# Altium PCB FRDM-TFC.PcbDoc (part 2 of 2)
Units mil, origin at the board's own origin, x right, y up, seen from the top; angles counter-clockwise.
Board outline 3200 x 2100 mil, 2 copper layers (Top Layer, Bottom Layer), stack 15.3 mil thick; 77 components, 81 nets, 511 pads, 817 vias.
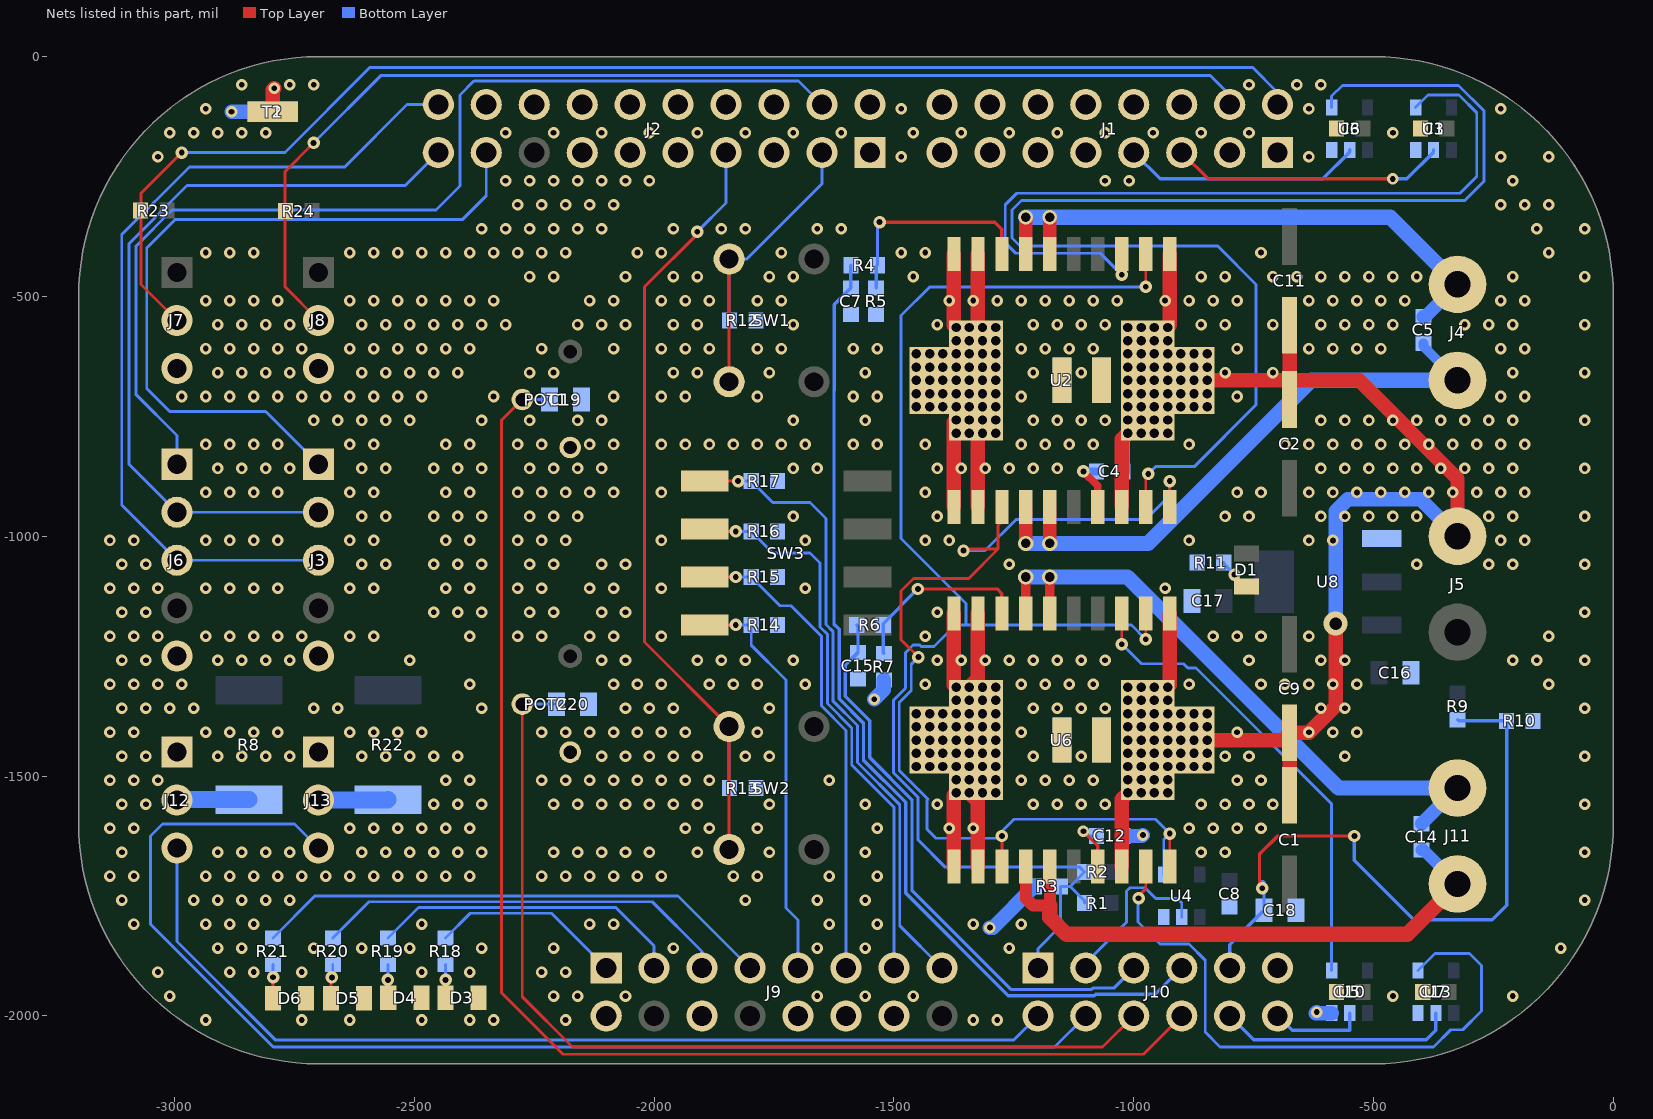
[diagram p2: the nets of this part, all layers, seen from the top]

## Via types
v1: diameter 24, hole 12, Top Layer to Bottom Layer, tented both sides, 770 vias
v2: diameter 26, hole 12, Top Layer to Bottom Layer, tented both sides, 36 vias
v3: diameter 32, hole 20, Top Layer to Bottom Layer, tented both sides, 4 vias
v4: diameter 24, hole 12, Top Layer to Bottom Layer, 2 vias
v5: diameter 30, hole 20, Top Layer to Bottom Layer, tented both sides, 2 vias
v6: diameter 26, hole 12, Top Layer to Bottom Layer, 1 vias
v7: diameter 50, hole 26, Top Layer to Bottom Layer, tented both sides, 1 vias
v8: diameter 44, hole 28, Top Layer to Bottom Layer, tented both sides, 1 vias

## Nets (pads, with @x,y where several pads share a name; then routed paths per layer and width w, separated by ;. In a path a pad name is that pad's centre, name@x,y a point inside that pad or via, vN(x,y) a via of type N, cw(c..) or ccw(c..) an arc to the next point about the centre after c; other vN are vias at no path point) (continued)
GND: C1.2 C2.2 C3.1 C4.2 C6.1 C7.2 C8.1 C9.2 C10.1 C11.2 C12.2 C13.1 C15.2 C16.2 C17.2 C18.1 C19.1 C20.1 D3.C D4.C D5.C D6.C J2.14 J3.5 J5.2 J6.5 J7.3 J8.3 J9.12 J9.14 J12.1 J13.1 POT1.3 POT2.3 R3.1 R5.1 R7.1 R10.2 R11.1 R12.1 R13.1 R14.1 R15.1 R16.1 R17.1 T1.1 T2.1 U1.3 U2.1 U2.9 U2.10 U2.11 U2.12 U2.18 U2.HEATSINK U3.3 U4.3 U5.3 U6.1 U6.9 U6.10 U6.11 U6.12 U6.18 U6.HEATSINK U7.3 U8.1 | length 4543.1
  Top Layer w30: T1.1@-2795,-115 -2795,-69 v1(-2792,-66) ; U6.11@-1375,-1688.78 -1375,-1539.76 U6.HEATSINK@-1370.47,-1535.24 ; U6.10@-1375,-1161.22 -1375,-1310.24 U6.HEATSINK@-1370.47,-1314.76 ; U2.11@-1375,-938.78 -1375,-762.2 U2.HEATSINK@-1370.47,-757.68 ; U2.10@-1375,-411.22 -1375,-560.24 U2.HEATSINK@-1370.47,-564.76 ; U6.HEATSINK@-1342.91,-1535.24 -1325,-1553.15 U6.12@-1325,-1688.78 ; U6.HEATSINK@-1342.91,-1314.76 -1325,-1296.85 U6.9@-1325,-1161.22 ; U2.HEATSINK@-1342.91,-730.12 -1325,-748.03 U2.12@-1325,-938.78 ; U2.9@-1325,-411.22 -1325,-555.12 U2.HEATSINK@-1315.35,-564.76 ; U6.18@-1025,-1688.78 -1025,-1548.03 U6.HEATSINK@-1012.2,-1535.24 ; U2.18@-1025,-938.78 -1025,-798.03 U2.HEATSINK@-1012.2,-785.24 ; U6.HEATSINK@-929.53,-1314.76 -925,-1310.24 U6.1@-925,-1161.22 ; U2.HEATSINK@-929.53,-564.76 -925,-560.24 U2.1@-925,-411.22 ; U6.HEATSINK@-901.97,-1425 U6.HEATSINK@-874.41,-1425 U6.HEATSINK@-846.85,-1425 -690,-1425 C9.2@-675,-1410 ; U2.HEATSINK@-874.41,-675 U2.HEATSINK@-846.85,-675 C2.2@-675,-675 ; C1.2@-675,-1540 C9.2@-675,-1410 ; C2.2@-675,-715 C2.2@-675,-675 ; C11.2@-675,-560 C2.2@-675,-675 ; v7(-579,-1182) -579,-1354 -635,-1410 C9.2@-675,-1410 ; J5.2@-325,-1000 -325,-880 -530,-675 C2.2@-675,-675
  Bottom Layer w30: v1(-2881,-115) T2.1@-2795,-115 ; v4(-1541,-1340) -1521,-1320 R7.1@-1521,-1299.56 ; v1(-1300,-1816) -1293.56,-1816 R3.1@-1207.56,-1730 ; C12.2@-1022.44,-1625 -983,-1625 v4(-981,-1623) ; C4.2@-1022.44,-865 -1022.44,-795.47 U2.HEATSINK@-1012.2,-785.24 ; v1(-618.42,-1992) -620.71,-1994.29 U5.3@-587.4,-1994.29 ; v7(-579,-1182) -579,-948 -554,-923 -402,-923 J5.2@-325,-1000
  other v1: -2934.74,-2008.65 -2734.74,-2008.65 -2634.74,-2008.65 -2484.74,-2008.65 -2384.74,-2008.65 -2334.74,-2008.65 -2184.74,-2008.65 -1334.74,-2008.65 -1284.74,-2008.65 -3009.74,-1958.65 -2209.74,-1958.65 -2159.74,-1958.65 -2059.74,-1958.65 -1659.74,-1958.65 -1559.74,-1958.65 -1459.74,-1958.65 -459.74,-1958.65 -209.74,-1958.65 -3034.74,-1908.65 -2884.74,-1908.65 -2834.74,-1908.65 -2734.74,-1908.65 -2484.74,-1908.65 -2384.74,-1908.65 -2234.74,-1908.65 -2184.74,-1908.65 -2909.74,-1858.65 -2859.74,-1858.65 -2709.74,-1858.65 -2609.74,-1858.65 -2509.74,-1858.65 -2359.74,-1858.65 -2209.74,-1858.65 -1959.74,-1858.65 -1659.74,-1858.65 -1559.74,-1858.65 -1259.74,-1858.65 -109.74,-1858.65 -3084.74,-1808.65 -2934.74,-1808.65 -2884.74,-1808.65 -2834.74,-1808.65 -2484.74,-1808.65 -2134.74,-1808.65 -2084.74,-1808.65 -1634.74,-1808.65 -1534.74,-1808.65 -1334.74,-1808.65 -1234.74,-1808.65 -3109.74,-1758.65 -2959.74,-1758.65 -2909.74,-1758.65 -2859.74,-1758.65 -2809.74,-1758.65 -2759.74,-1758.65 -1809.74,-1758.65 -1659.74,-1758.65 -1559.74,-1758.65 -59.74,-1758.65 -3134.74,-1708.65 -3084.74,-1708.65 -2934.74,-1708.65 -2884.74,-1708.65 -2834.74,-1708.65 -2784.74,-1708.65 -2734.74,-1708.65 -2684.74,-1708.65 -2634.74,-1708.65 -2584.74,-1708.65 -2534.74,-1708.65 -2484.74,-1708.65 -2434.74,-1708.65 -2384.74,-1708.65 -2234.74,-1708.65 -2184.74,-1708.65 -2134.74,-1708.65 -2084.74,-1708.65 -2034.74,-1708.65 -1984.74,-1708.65 -1834.74,-1708.65 -1784.74,-1708.65 -1634.74,-1708.65 -1534.74,-1708.65 -3109.74,-1658.65 -2909.74,-1658.65 -2859.74,-1658.65 -2809.74,-1658.65 -2759.74,-1658.65 -2609.74,-1658.65 -2559.74,-1658.65 -2509.74,-1658.65 -2459.74,-1658.65 -2409.74,-1658.65 -2359.74,-1658.65 -2209.74,-1658.65 -2159.74,-1658.65 -2109.74,-1658.65 -2059.74,-1658.65 -2009.74,-1658.65 -1909.74,-1658.65 -1759.74,-1658.65 -1559.74,-1658.65 -859.74,-1658.65 -809.74,-1658.65 -59.74,-1658.65 -3134.74,-1608.65 -3084.74,-1608.65 -2634.74,-1608.65 -2584.74,-1608.65 -2534.74,-1608.65 -2484.74,-1608.65 -2434.74,-1608.65 -2384.74,-1608.65 -1934.74,-1608.65 -1884.74,-1608.65 -1784.74,-1608.65 -1534.74,-1608.65 -1384.74,-1608.65 -1334.74,-1608.65 -884.74,-1608.65 -834.74,-1608.65 -784.74,-1608.65 -734.74,-1608.65 -3109.74,-1558.65 -3059.74,-1558.65 -2459.74,-1558.65 -2409.74,-1558.65 -2359.74,-1558.65 -2209.74,-1558.65 -2159.74,-1558.65 -2109.74,-1558.65 -2059.74,-1558.65 -2009.74,-1558.65 -1959.74,-1558.65 -1909.74,-1558.65 -1759.74,-1558.65 -1559.74,-1558.65 -1409.74,-1558.65 -1209.74,-1558.65 -1159.74,-1558.65 -1109.74,-1558.65 -1059.74,-1558.65 -859.74,-1558.65 -809.74,-1558.65 -759.74,-1558.65 -709.74,-1558.65 -59.74,-1558.65 -3134.74,-1508.65 -3084.74,-1508.65 -3034.74,-1508.65 -2434.74,-1508.65 -2384.74,-1508.65 -2234.74,-1508.65 -2184.74,-1508.65 -2134.74,-1508.65 -2084.74,-1508.65 -2034.74,-1508.65 -1984.74,-1508.65 -1934.74,-1508.65 -1884.74,-1508.65 -1634.74,-1508.65 -1234.74,-1508.65 -1184.74,-1508.65 -1134.74,-1508.65 -1084.74,-1508.65 -784.74,-1508.65 -734.74,-1508.65 -3109.74,-1458.65 -3059.74,-1458.65 -2909.74,-1458.65 -2859.74,-1458.65 -2809.74,-1458.65 -2759.74,-1458.65 -2609.74,-1458.65 -2559.74,-1458.65 -2509.74,-1458.65 -2459.74,-1458.65 -2409.74,-1458.65 -2109.74,-1458.65 -2059.74,-1458.65 -2009.74,-1458.65 -1959.74,-1458.65 -1909.74,-1458.65 -1809.74,-1458.65 -1759.74,-1458.65 -1209.74,-1458.65 -1109.74,-1458.65 -809.74,-1458.65 -759.74,-1458.65 -559.74,-1458.65 -59.74,-1458.65 -3134.74,-1408.65 -3084.74,-1408.65 -2934.74,-1408.65 -2884.74,-1408.65 -2834.74,-1408.65 -2784.74,-1408.65 -2634.74,-1408.65 -2584.74,-1408.65 -2534.74,-1408.65 -2484.74,-1408.65 -2234.74,-1408.65 -2184.74,-1408.65 -2134.74,-1408.65 -2084.74,-1408.65 -2034.74,-1408.65 -1984.74,-1408.65 -1934.74,-1408.65 -1784.74,-1408.65 -1234.74,-1408.65 -784.74,-1408.65 -634.74,-1408.65 -584.74,-1408.65 -534.74,-1408.65 -3109.74,-1358.65 -3059.74,-1358.65 -3009.74,-1358.65 -2959.74,-1358.65 -2709.74,-1358.65 -2659.74,-1358.65 -2359.74,-1358.65 -2059.74,-1358.65 -2009.74,-1358.65 -1959.74,-1358.65 -1759.74,-1358.65 -1209.74,-1358.65 -1159.74,-1358.65 -1109.74,-1358.65 -1059.74,-1358.65 -609.74,-1358.65 -559.74,-1358.65 -59.74,-1358.65 -3134.74,-1308.65 -3084.74,-1308.65 -3034.74,-1308.65 -2984.74,-1308.65 -2384.74,-1308.65 -2084.74,-1308.65 -2034.74,-1308.65 -1984.74,-1308.65 -1884.74,-1308.65 -1834.74,-1308.65 -1784.74,-1308.65 -1684.74,-1308.65 -1434.74,-1308.65 -1234.74,-1308.65 -1184.74,-1308.65 -1134.74,-1308.65 -1084.74,-1308.65 -884.74,-1308.65 -734.74,-1308.65 -684.74,-1308.65 -634.74,-1308.65 -584.74,-1308.65 -534.74,-1308.65 -134.74,-1308.65 -3109.74,-1258.65 -3059.74,-1258.65 -2909.74,-1258.65 -2859.74,-1258.65 -2809.74,-1258.65 -2759.74,-1258.65 -2509.74,-1258.65 -2109.74,-1258.65 -2059.74,-1258.65 -1909.74,-1258.65 -1859.74,-1258.65 -1809.74,-1258.65 -1709.74,-1258.65 -1409.74,-1258.65 -1359.74,-1258.65 -1309.74,-1258.65 -1259.74,-1258.65 -1209.74,-1258.65 -1159.74,-1258.65 -1109.74,-1258.65 -1059.74,-1258.65 -759.74,-1258.65 -609.74,-1258.65 -559.74,-1258.65 -209.74,-1258.65 -159.74,-1258.65 -59.74,-1258.65 -3134.74,-1208.65 -3084.74,-1208.65 -3034.74,-1208.65 -2934.74,-1208.65 -2884.74,-1208.65 -2834.74,-1208.65 -2784.74,-1208.65 -2734.74,-1208.65 -2634.74,-1208.65 -2584.74,-1208.65 -2384.74,-1208.65 -2284.74,-1208.65 -2234.74,-1208.65 -2134.74,-1208.65 -2084.74,-1208.65 -1984.74,-1208.65 -1434.74,-1208.65 -834.74,-1208.65 -784.74,-1208.65 -734.74,-1208.65 -634.74,-1208.65 -134.74,-1208.65 -3109.74,-1158.65 -3059.74,-1158.65 -2459.74,-1158.65 -2409.74,-1158.65 -2359.74,-1158.65 -2259.74,-1158.65 -2209.74,-1158.65 -2109.74,-1158.65 -2059.74,-1158.65 -1409.74,-1158.65 -59.74,-1158.65 -3134.74,-1108.65 -3084.74,-1108.65 -3034.74,-1108.65 -2934.74,-1108.65 -2884.74,-1108.65 -2834.74,-1108.65 -2784.74,-1108.65 -2634.74,-1108.65 -2584.74,-1108.65 -2434.74,-1108.65 -2384.74,-1108.65 -2284.74,-1108.65 -2234.74,-1108.65 -2134.74,-1108.65 -2084.74,-1108.65 -1984.74,-1108.65 -1684.74,-1108.65 -934.74,-1108.65 -3109.74,-1058.65 -3059.74,-1058.65 -2609.74,-1058.65 -2559.74,-1058.65 -2459.74,-1058.65 -2409.74,-1058.65 -2359.74,-1058.65 -2259.74,-1058.65 -2209.74,-1058.65 -2109.74,-1058.65 -2059.74,-1058.65 -1259.74,-1058.65 -409.74,-1058.65 -259.74,-1058.65 -209.74,-1058.65 -59.74,-1058.65 -3134.74,-1008.65 -3084.74,-1008.65 -2934.74,-1008.65 -2884.74,-1008.65 -2834.74,-1008.65 -2784.74,-1008.65 -2634.74,-1008.65 -2584.74,-1008.65 -2434.74,-1008.65 -2384.74,-1008.65 -2284.74,-1008.65 -2234.74,-1008.65 -2184.74,-1008.65 -1984.74,-1008.65 -1684.74,-1008.65 -1434.74,-1008.65 -1384.74,-1008.65 -884.74,-1008.65 -634.74,-1008.65 -584.74,-1008.65 -234.74,-1008.65 -184.74,-1008.65 -2609.74,-958.65 -2559.74,-958.65 -2459.74,-958.65 -2409.74,-958.65 -2359.74,-958.65 -2259.74,-958.65 -2209.74,-958.65 -2159.74,-958.65 -1709.74,-958.65 -1409.74,-958.65 -809.74,-958.65 -759.74,-958.65 -609.74,-958.65 -559.74,-958.65 -509.74,-958.65 -459.74,-958.65 -409.74,-958.65 -259.74,-958.65 -209.74,-958.65 -59.74,-958.65 -2934.74,-908.65 -2884.74,-908.65 -2834.74,-908.65 -2784.74,-908.65 -2634.74,-908.65 -2584.74,-908.65 -2434.74,-908.65 -2384.74,-908.65 -2284.74,-908.65 -2234.74,-908.65 -2184.74,-908.65 -2134.74,-908.65 -2084.74,-908.65 -1984.74,-908.65 -1434.74,-908.65 -784.74,-908.65 -734.74,-908.65 -634.74,-908.65 -584.74,-908.65 -534.74,-908.65 -484.74,-908.65 -434.74,-908.65 -384.74,-908.65 -334.74,-908.65 -284.74,-908.65 -234.74,-908.65 -184.74,-908.65 -2909.74,-858.65 -2859.74,-858.65 -2809.74,-858.65 -2759.74,-858.65 -2609.74,-858.65 -2559.74,-858.65 -2459.74,-858.65 -2409.74,-858.65 -2359.74,-858.65 -2259.74,-858.65 -2209.74,-858.65 -2159.74,-858.65 -2109.74,-858.65 -1709.74,-858.65 -1659.74,-858.65 -1409.74,-858.65 -1359.74,-858.65 -1309.74,-858.65 -1259.74,-858.65 -1209.74,-858.65 -1159.74,-858.65 -609.74,-858.65 -559.74,-858.65 -509.74,-858.65 -459.74,-858.65 -409.74,-858.65 -359.74,-858.65 -309.74,-858.65 -259.74,-858.65 -209.74,-858.65 -59.74,-858.65 -2934.74,-808.65 -2884.74,-808.65 -2834.74,-808.65 -2784.74,-808.65 -2634.74,-808.65 -2584.74,-808.65 -2434.74,-808.65 -2384.74,-808.65 -2284.74,-808.65 -2234.74,-808.65 -2134.74,-808.65 -2084.74,-808.65 -1984.74,-808.65 -1934.74,-808.65 -1884.74,-808.65 -1834.74,-808.65 -1784.74,-808.65 -1734.74,-808.65 -1684.74,-808.65 -1584.74,-808.65 -1534.74,-808.65 -1434.74,-808.65 -1234.74,-808.65 -1184.74,-808.65 -1134.74,-808.65 -1084.74,-808.65 -884.74,-808.65 -684.74,-808.65 -634.74,-808.65 -584.74,-808.65 -534.74,-808.65 -484.74,-808.65 -434.74,-808.65 -384.74,-808.65 -334.74,-808.65 -284.74,-808.65 -234.74,-808.65 -184.74,-808.65 -2709.74,-758.65 -2659.74,-758.65 -2609.74,-758.65 -2559.74,-758.65 -2509.74,-758.65 -2359.74,-758.65 -2259.74,-758.65 -2159.74,-758.65 -2109.74,-758.65 -1709.74,-758.65 -1559.74,-758.65 -1209.74,-758.65 -1159.74,-758.65 -1109.74,-758.65 -1059.74,-758.65 -609.74,-758.65 -559.74,-758.65 -509.74,-758.65 -459.74,-758.65 -409.74,-758.65 -359.74,-758.65 -309.74,-758.65 -259.74,-758.65 -209.74,-758.65 -59.74,-758.65 -2984.74,-708.65 -2934.74,-708.65 -2884.74,-708.65 -2834.74,-708.65 -2784.74,-708.65 -2734.74,-708.65 -2684.74,-708.65 -2634.74,-708.65 -2584.74,-708.65 -2534.74,-708.65 -2484.74,-708.65 -2334.74,-708.65 -2084.74,-708.65 -1984.74,-708.65 -1934.74,-708.65 -1784.74,-708.65 -1584.74,-708.65 -1534.74,-708.65 -1234.74,-708.65 -784.74,-708.65 -234.74,-708.65 -184.74,-708.65 -2909.74,-658.65 -2859.74,-658.65 -2809.74,-658.65 -2759.74,-658.65 -2609.74,-658.65 -2559.74,-658.65 -2509.74,-658.65 -2459.74,-658.65 -2409.74,-658.65 -2259.74,-658.65 -2209.74,-658.65 -1959.74,-658.65 -1909.74,-658.65 -1759.74,-658.65 -1559.74,-658.65 -1209.74,-658.65 -1109.74,-658.65 -809.74,-658.65 -709.74,-658.65 -209.74,-658.65 -59.74,-658.65 -2934.74,-608.65 -2884.74,-608.65 -2834.74,-608.65 -2784.74,-608.65 -2734.74,-608.65 -2634.74,-608.65 -2584.74,-608.65 -2534.74,-608.65 -2484.74,-608.65 -2434.74,-608.65 -2384.74,-608.65 -2234.74,-608.65 -2084.74,-608.65 -1984.74,-608.65 -1934.74,-608.65 -1884.74,-608.65 -1784.74,-608.65 -1734.74,-608.65 -1584.74,-608.65 -1534.74,-608.65 -1234.74,-608.65 -1184.74,-608.65 -1134.74,-608.65 -1084.74,-608.65 -784.74,-608.65 -634.74,-608.65 -584.74,-608.65 -534.74,-608.65 -484.74,-608.65 -234.74,-608.65 -184.74,-608.65 -2909.74,-558.65 -2859.74,-558.65 -2809.74,-558.65 -2759.74,-558.65 -2609.74,-558.65 -2559.74,-558.65 -2509.74,-558.65 -2459.74,-558.65 -2409.74,-558.65 -2359.74,-558.65 -2309.74,-558.65 -2159.74,-558.65 -2109.74,-558.65 -2059.74,-558.65 -1959.74,-558.65 -1909.74,-558.65 -1709.74,-558.65 -1409.74,-558.65 -1209.74,-558.65 -1159.74,-558.65 -1109.74,-558.65 -1059.74,-558.65 -859.74,-558.65 -809.74,-558.65 -709.74,-558.65 -609.74,-558.65 -559.74,-558.65 -509.74,-558.65 -459.74,-558.65 -309.74,-558.65 -259.74,-558.65 -209.74,-558.65 -59.74,-558.65 -2934.74,-508.65 -2884.74,-508.65 -2834.74,-508.65 -2784.74,-508.65 -2634.74,-508.65 -2584.74,-508.65 -2534.74,-508.65 -2484.74,-508.65 -2434.74,-508.65 -2384.74,-508.65 -2334.74,-508.65 -2134.74,-508.65 -2084.74,-508.65 -1984.74,-508.65 -1934.74,-508.65 -1884.74,-508.65 -1784.74,-508.65 -1734.74,-508.65 -1384.74,-508.65 -1334.74,-508.65 -1284.74,-508.65 -1234.74,-508.65 -1184.74,-508.65 -1134.74,-508.65 -1084.74,-508.65 -1034.74,-508.65 -934.74,-508.65 -884.74,-508.65 -834.74,-508.65 -784.74,-508.65 -634.74,-508.65 -584.74,-508.65 -534.74,-508.65 -484.74,-508.65 -434.74,-508.65 -234.74,-508.65 -184.74,-508.65 -2259.74,-458.65 -2209.74,-458.65 -2059.74,-458.65 -1959.74,-458.65 -1909.74,-458.65 -1759.74,-458.65 -1709.74,-458.65 -1459.74,-458.65 -859.74,-458.65 -809.74,-458.65 -709.74,-458.65 -659.74,-458.65 -609.74,-458.65 -559.74,-458.65 -509.74,-458.65 -459.74,-458.65 -409.74,-458.65 -209.74,-458.65 -59.74,-458.65 -2934.74,-408.65 -2884.74,-408.65 -2834.74,-408.65 -2634.74,-408.65 -2584.74,-408.65 -2534.74,-408.65 -2484.74,-408.65 -2434.74,-408.65 -2384.74,-408.65 -2334.74,-408.65 -2284.74,-408.65 -2234.74,-408.65 -2184.74,-408.65 -2034.74,-408.65 -1984.74,-408.65 -1734.74,-408.65 -1484.74,-408.65 -1434.74,-408.65 -734.74,-408.65 -134.74,-408.65 -2359.74,-358.65 -2309.74,-358.65 -2259.74,-358.65 -2209.74,-358.65 -2159.74,-358.65 -2109.74,-358.65 -1959.74,-358.65 -1859.74,-358.65 -1809.74,-358.65 -1659.74,-358.65 -1609.74,-358.65 -159.74,-358.65 -59.74,-358.65 -2284.74,-308.65 -2234.74,-308.65 -2184.74,-308.65 -2134.74,-308.65 -2084.74,-308.65 -234.74,-308.65 -184.74,-308.65 -134.74,-308.65 -2309.74,-258.65 -2259.74,-258.65 -2209.74,-258.65 -2159.74,-258.65 -2109.74,-258.65 -2059.74,-258.65 -2009.74,-258.65 -1059.74,-258.65 -1009.74,-258.65 -209.74,-258.65 -3034.74,-208.65 -1484.74,-208.65 -634.74,-208.65 -234.74,-208.65 -134.74,-208.65 -3009.74,-158.65 -2959.74,-158.65 -2909.74,-158.65 -2859.74,-158.65 -2809.74,-158.65 -2309.74,-158.65 -2209.74,-158.65 -2109.74,-158.65 -2009.74,-158.65 -1909.74,-158.65 -1809.74,-158.65 -1709.74,-158.65 -1609.74,-158.65 -1459.74,-158.65 -1359.74,-158.65 -1259.74,-158.65 -1159.74,-158.65 -1059.74,-158.65 -959.74,-158.65 -859.74,-158.65 -759.74,-158.65 -459.74,-158.65 -2934.74,-108.65 -1484.74,-108.65 -634.74,-108.65 -234.74,-108.65 -2859.74,-58.65 -2759.74,-58.65 -2709.74,-58.65 -759.74,-58.65 -659.74,-58.65 -609.74,-58.65
H-BRIDGE_A-IFB: C7.1 J10.7 R4.2 | length 2073.7
  Bottom Layer w7: R4.2@-1589.56,-435 -1590,-435.44 C7.1@-1590,-482.44 -1624.42,-516.86 -1624.42,-695.35 -1625,-695.93 -1625,-1183.38 -1614.23,-1194.15 -1614.23,-1338.92 -1563.5,-1389.66 -1563.5,-1466.75 -1475.5,-1554.75 -1475.5,-1743.88 -1261.38,-1958 -1082.6,-1958 -1079.6,-1955 -955,-1955 J10.7@-900,-1900
H-BRIDGE_A-IN1: J1.5 U1.2 | length 575.6
  Top Layer w7: J1.5@-900,-200 -845,-255 v1(-460,-255)
  Bottom Layer w7: v1(-460,-255) -431.13,-255 -375,-198.87 U1.2@-375,-194.29
H-BRIDGE_A-IN2: J1.7 U3.2 | length 500.6
  Bottom Layer w7: J1.7@-1000,-200 -945,-255 -606.13,-255 -550,-198.87 U3.2@-550,-194.29
H-BRIDGE_A-OUT1: C5.2 J4.2 U2.6 U2.7 | length 1209.4
  Top Layer w28: U2.7@-1225,-411.22 v5(-1225,-335) ; U2.6@-1175,-411.22 v5(-1175,-335)
  Bottom Layer w28: C5.2@-396,-542.44 -392.44,-542.44 J4.2@-325,-475
  Bottom Layer w32: v5(-1225,-335) v5(-1175,-335) -465,-335 J4.2@-325,-475
H-BRIDGE_A-OUT2: C5.1 J4.1 U2.14 U2.15 | length 1300.1
  Top Layer w28: v3(-1225,-1015) U2.14@-1225,-938.78 ; v3(-1175,-1015) U2.15@-1175,-938.78
  Bottom Layer w20: C5.1@-396,-597.56 -396,-604 J4.1@-325,-675
  Bottom Layer w32: v3(-1225,-1015) v3(-1175,-1015) -970,-1015 -630,-675 J4.1@-325,-675
H-BRIDGE_B-IFB: C15.1 J10.5 R6.2 | length 1189.6
  Bottom Layer w7: R6.2@-1577.56,-1185 -1575,-1187.56 C15.1@-1575,-1242.44 -1601.23,-1268.67 -1601.23,-1333.54 -1550.5,-1384.27 -1550.5,-1461.37 -1462.5,-1549.37 -1462.5,-1738.5 -1256,-1945 -1087.99,-1945 -1084.99,-1942 -1042,-1942 J10.5@-1000,-1900
H-BRIDGE_B-IN1: J10.12 U5.2 | length 198.1
  Bottom Layer w7: J10.12@-700,-2000 -670,-2030 -550,-2030 U5.2@-550,-1994.29
H-BRIDGE_B-IN2: J10.10 U7.2 | length 494.7
  Bottom Layer w7: J10.10@-800,-2000 -750,-2050 -390,-2050 -370,-2030 U7.2@-370,-1994.29
H-BRIDGE_B-OUT1: C14.2 J11.2 U6.6 U6.7 | length 1340.5
  Top Layer w20: U6.7@-1225,-1161.22 v3(-1225,-1085) ; U6.6@-1175,-1161.22 v3(-1175,-1085)
  Bottom Layer w28: C14.2@-400,-1599.44 -325.56,-1525 J11.2@-325,-1525
  Bottom Layer w32: v3(-1225,-1085) v3(-1175,-1085) -1013,-1085 -573,-1525 J11.2@-325,-1525
H-BRIDGE_B-OUT2: C14.1 J11.1 U6.14 U6.15 | length 1240.8
  Top Layer w25: U6.14@-1225,-1688.78 -1225,-1755 -1210,-1770 -1175,-1770 U6.15@-1175,-1688.78
  Top Layer w32: -1175,-1770 -1175,-1795 -1140,-1830 -430,-1830 J11.1@-325,-1725
  Bottom Layer w25: C14.1@-400,-1654.56 -395.44,-1654.56 J11.1@-325,-1725
NetC4_1: C4.1 U2.17 | length 113.6
  Top Layer w16: v2(-1105,-865) -1075,-895 U2.17@-1075,-938.78
  Bottom Layer w16: v2(-1105,-865) C4.1@-1077.56,-865
NetC12_1: C12.1 U6.17 | length 117.8
  Top Layer w7: v1(-1105,-1615) -1075,-1645 U6.17@-1075,-1688.78
  Bottom Layer w7: v1(-1105,-1615) -1095,-1625 C12.1@-1077.56,-1625
NetD1_C: D1.C R11.2 | length 69.4
  Top Layer w7: v2(-790,-1080) -789.45,-1080 D1.C@-765,-1104.45
  Bottom Layer w7: R11.2@-812.44,-1055 -812.44,-1057.56 v2(-790,-1080)
NetD3_A: D3.A R18.2 | length 69.6
  Top Layer w6: D3.A@-2435.45,-1962 -2435.45,-1925.45 v2(-2435,-1925)
  Bottom Layer w6: v2(-2435,-1925) R18.2@-2435,-1892.56
NetD4_A: D4.A R19.2 | length 69.7
  Top Layer w6: v2(-2555,-1925) -2554.45,-1925.55 D4.A@-2554.45,-1962
  Bottom Layer w6: v2(-2555,-1925) R19.2@-2555,-1892.56
NetD5_A: D5.A R20.2 | length 75
  Top Layer w6: D5.A@-2673.45,-1963 -2673.45,-1918.45 v2(-2671.9,-1920)
  Bottom Layer w6: v2(-2671.9,-1920) -2670,-1918.1 R20.2@-2670,-1892.56
NetD6_A: D6.A R21.2 | length 70.7
  Top Layer w6: D6.A@-2794.45,-1963 v2(-2794.45,-1919.45)
  Bottom Layer w6: R21.2@-2795,-1892.56 -2794.45,-1893.11 v2(-2794.45,-1919.45)
NetJ12_2: J12.2 R8.2 | length 150.3
  Bottom Layer w35: J12.2@-2995,-1550 -2994.17,-1549.17 R8.2@-2845,-1549.17
NetJ13_2: J13.2 R22.2 | length 145.3
  Bottom Layer w35: J13.2@-2700,-1550 -2555.83,-1550 R22.2@-2555,-1549.17
NetR4_1: R4.1 R5.2 U2.8 | length 452.8
  Top Layer w7: v2(-1530,-345) -1290,-345 -1275,-360 U2.8@-1275,-411.22
  Bottom Layer w7: R5.2@-1537,-482.44 -1537,-437.56 R4.1@-1534.44,-435 -1534.44,-349.44 v2(-1530,-345)
NetR6_1: R6.1 R7.2 U6.8 | length 385.4
  Top Layer w7: v2(-1450,-1110) -1285,-1110 -1275,-1120 U6.8@-1275,-1161.22
  Bottom Layer w7: R7.2@-1521,-1244.44 -1522.44,-1243 R6.1@-1522.44,-1185 -1522.44,-1182.44 v2(-1450,-1110)
NetU1_4: U1.4 U2.3 | length 1687.3
  Top Layer w6: v2(-1025,-455) U2.3@-1025,-411.22
  Bottom Layer w6: v2(-1025,-455) -1070,-410 -1246,-410 -1268,-388 -1268,-309 -1244,-285 -320,-285 -285,-250 -285,-117.04 -322.06,-79.98 -386.67,-79.98 U1.4@-412.4,-105.71
NetU2_13: U2.13 U2.20 U4.4 U6.13 U6.20 | length 2290.2
  Top Layer w6: v6(-1449,-1252) -1485,-1216 -1485,-1113.89 -1459.11,-1088 -1344,-1088 -1282.94,-1026.94 ; v2(-1355,-1030) -1351.94,-1026.94 -1282.94,-1026.94 ; U6.13@-1275,-1688.78 v2(-1275,-1625) ; U2.13@-1275,-938.78 -1275,-970 -1282.94,-977.94 -1282.94,-1026.94 ; U6.20@-925,-1688.78 v2(-925,-1620) ; U2.20@-925,-938.78 v2(-925,-885)
  Bottom Layer w6: v6(-1449,-1252) -1464,-1267 -1464,-1321.78 -1489,-1346.78 -1489,-1488.22 -1429,-1548.22 -1430.74,-1549.96 -1430.74,-1611.26 -1412.35,-1629.65 -1279.65,-1629.65 v2(-1275,-1625) -1275,-1615 -1250,-1590 -955,-1590 v2(-925,-1620) -937.4,-1632.4 U4.4@-937.4,-1705.71 ; v2(-1355,-1030) -1310,-1030 -1245,-965 -975,-965 -925,-915 v2(-925,-885)
NetU2_19: U2.19 U3.4 | length 2741.5
  Top Layer w6: U2.19@-975,-938.78 -975,-875 v2(-970,-870)
  Bottom Layer w6: v2(-970,-870) -955,-855 -874,-855 -745,-726 -745,-475 -825,-395 -1237,-395 -1254,-378 -1254,-320 -1234,-300 -310,-300 -270,-260 -270,-113 -323,-60 -565,-60 -587.4,-82.4 U3.4@-587.4,-105.71
NetU5_4: U5.4 U6.3 | length 987.3
  Top Layer w6: v2(-1025,-1225) U6.3@-1025,-1161.22
  Bottom Layer w6: v2(-1025,-1225) -984,-1266 -896.27,-1266 -887.27,-1275 -870,-1275 -587.4,-1557.6 U5.4@-587.4,-1905.71
NetU6_19: U6.19 U7.4 | length 1326
  Top Layer w6: v2(-990,-1755) -990,-1750 -975,-1735 U6.19@-975,-1688.78
  Bottom Layer w6: v2@-991,-1751 -991,-1804 -945,-1850 -885,-1850 -851,-1884 -851,-2034 -820,-2065 -375,-2065 -339,-2029 -314,-2029 -275,-1990 -275,-1895 -300,-1870 -371.69,-1870 U7.4@-407.4,-1905.71 ; v2(-990,-1755) v2@-990,-1750
P5V_USB: J9.10
PTA1: J1.2 J7.2 R23.1 | length 2821.1
  Top Layer w6: J7.2@-2995,-550 -3070,-475 -3070,-285 v2(-2985,-200)
  Bottom Layer w6: v2(-2985,-200) -2770,-200 -2593,-23 -752,-23 -700,-75 J1.2@-700,-100
PTA2: J1.4 J8.2 R24.1 | length 2429.2
  Top Layer w6: v2(-2710,-180) -2770,-240 -2770,-480 J8.2@-2700,-550
  Bottom Layer w6: v2(-2710,-180) -2569,-39 -841,-39 -800,-80 J1.4@-800,-100
PTA4: J1.10
PTA5: J1.12
PTA12: J1.8
PTA13: J2.2
PTA16: J2.9
PTA17: J2.11
PTB0: J10.2 J12.3 | length 2095.6
  Bottom Layer w6: J12.3@-2995,-1650 -2995,-1845 -2790,-2050 -1250,-2050 J10.2@-1200,-2000
PTB1: J10.4 J13.3 | length 2648
  Bottom Layer w6: J13.3@-2700,-1650 -2750,-1600 -3025,-1600 -3050,-1625 -3050,-1809 -2794,-2065 -1165,-2065 J10.4@-1100,-2000
PTB2: C20.2 J10.6 POT2.2 | length 2027
  Top Layer w6: POT2.2@-2275,-1350 -2275,-1960 -2170,-2065 -1065,-2065 J10.6@-1000,-2000
  Bottom Layer w6: POT2.2@-2275,-1350 C20.2@-2203.46,-1350
PTB3: C19.2 J10.8 POT1.2 | length 2815.5
  Top Layer w6: POT1.2@-2275,-715 -2318,-758 -2318,-1952 -2190,-2080 -980,-2080 J10.8@-900,-2000
  Bottom Layer w6: POT1.2@-2275,-715 C19.2@-2218.46,-715
PTB8: J9.1 R18.1 | length 403.5
  Bottom Layer w6: R18.1@-2435,-1837.44 -2383.56,-1786 -2214,-1786 J9.1@-2100,-1900
PTB9: J9.3 R19.1 | length 660.4
  Bottom Layer w6: R19.1@-2555,-1837.44 -2491.56,-1774 -2080,-1774 -2000,-1854 J9.3@-2000,-1900
PTB10: J9.5 R20.1 | length 878.3
  Bottom Layer w6: R20.1@-2670,-1837.44 -2594.56,-1762 -2004,-1762 -1900,-1866 J9.5@-1900,-1900
PTB11: J9.7 R21.1 | length 1093.4
  Bottom Layer w6: R21.1@-2795,-1837.44 -2707.56,-1750 -1950,-1750 J9.7@-1800,-1900
PTC0: J1.3
PTC5: J1.9
PTC6: J1.11
PTC7: J1.1
PTC8: J1.14
PTC9: J1.16
PTC10: J1.13
PTC11: J1.15
PTC12: J2.1
PTC13: J2.3 R12.2 SW1.B | length 691.1
  Top Layer w6: SW1.B@-1843.58,-677.95 SW1.B@-1843.58,-422.05
  Bottom Layer w6: R12.2@-1843.58,-533.58 SW1.B@-1843.58,-422.05 -1807.05,-422.05 -1650,-265 J2.3@-1650,-200
PTC16: J2.5
PTC17: J2.7 R13.2 SW2.B | length 1731.9
  Top Layer w6: v2(-1910,-365) -1905,-365 -2020,-480 -2020,-1220.63 SW2.B@-1843.58,-1397.05 SW2.B@-1843.58,-1652.95
  Bottom Layer w6: v2(-1910,-365) -1850,-305 J2.7@-1850,-200 ; SW2.B@-1843.58,-1397.05 -1843.58,-1523.98 R13.2@-1842.56,-1525
PTD0: J2.6
PTD1: J2.12
PTD2: J2.8
PTD3: J2.10
PTD4: J1.6
PTD5: J2.4 J6.1 | length 2194.3
  Bottom Layer w6: J6.1@-2995,-850 -2995,-790 -3080,-705 -3080,-395 -3005,-320 -2455,-320 -2405,-270 -2405,-80 -2376,-51 -1699,-51 J2.4@-1650,-100
PTD6: J2.17 J3.1 | length 1559.6
  Bottom Layer w6: J3.1@-2700,-850 -2810,-740 -3010,-740 -3058,-692 -3058,-399 -2999,-340 -2400,-340 -2350,-290 J2.17@-2350,-200
PTD7: J2.19 J3.2 J6.2 | length 1620.1
  Bottom Layer w6: J3.2@-2700,-950 J6.2@-2995,-950 -3095,-850 -3095,-390 -2974,-269 -2519,-269 J2.19@-2450,-200
PTE0: J2.18
PTE1: J2.20 J3.3 J6.3 | length 1793.9
  Bottom Layer w6: J3.3@-2700,-1050 J6.3@-2995,-1050 -3110,-935 -3110,-371 -2969,-230 -2645,-230 -2515,-100 J2.20@-2450,-100
PTE2: J9.9 R14.2 SW3.2 | length 852.4
  Top Layer w6: SW3.2@-1894.5,-1185 v2(-1830,-1185)
  Bottom Layer w6: v2(-1830,-1185) R14.2@-1797.56,-1185 -1797.56,-1227.44 -1725,-1300 -1725,-1775 -1700,-1800 J9.9@-1700,-1900
PTE3: J9.11 R15.2 SW3.4 | length 1007
  Top Layer w6: SW3.4@-1894.5,-1085 v2(-1830,-1085)
  Bottom Layer w6: v2(-1830,-1085) R15.2@-1797.56,-1085 -1737.56,-1145 -1715,-1145 -1650.73,-1209.27 -1650.73,-1354.04 -1600,-1404.77 J9.11@-1600,-1900
PTE4: J9.13 R16.2 SW3.6 | length 1177.7
  Top Layer w6: SW3.6@-1894.5,-985 -1889.5,-990 v2(-1830,-990)
  Bottom Layer w6: v2(-1830,-990) R16.2@-1797.56,-990 -1752.56,-1035 -1675,-1035 -1654,-1056 -1654,-1189.03 -1638.73,-1204.3 -1638.73,-1349.07 -1588,-1399.8 -1588,-1476.9 -1500,-1564.9 J9.13@-1500,-1900
PTE5: J9.15 R17.2 SW3.8 | length 1322
  Top Layer w6: SW3.8@-1894.5,-885 v2(-1825,-885)
  Bottom Layer w6: v2(-1825,-885) R17.2@-1797.56,-885 -1752.56,-930 -1675,-930 -1642,-963 -1642,-1184.06 -1626.73,-1199.33 -1626.73,-1344.1 -1576,-1394.83 -1576,-1471.93 -1488,-1559.93 -1488,-1812 J9.15@-1400,-1900
PTE20: J10.1 R1.1 R2.1 R3.2 U2.2 U6.2 | length 2994.1
  Top Layer w6: v2(-975,-1215) U6.2@-975,-1161.22 ; v2(-975,-480) U2.2@-975,-411.22
  Bottom Layer w6: J10.1@-1200,-1900 -1200,-1860 -1152.44,-1812.44 R3.2@-1152.44,-1730 -1132.56,-1730 ; R1.1@-1102.56,-1765 -1102.56,-1760 -1132.56,-1730 ; v2(-975,-1215) -1005,-1185 -1350,-1185 ; v2(-975,-480) -1425,-480 -1485,-540 -1485,-1005 -1350,-1140 -1350,-1185 ; -1350,-1185 -1372,-1185 -1416.65,-1229.65 -1443.43,-1229.65 -1446.09,-1227 -1460,-1227 -1476,-1243 -1476,-1316.81 -1501,-1341.81 -1501,-1493.19 -1450,-1544.19 -1450,-1633 -1393,-1690 -1112.56,-1690 R2.1@-1102.56,-1700 -1132.56,-1730
PTE21: J10.3 U4.2 | length 355.7
  Bottom Layer w6: J10.3@-1100,-1900 -1100,-1890 -1015,-1805 -1015,-1740 -1008,-1733 -976.84,-1733 -954.84,-1755 -910,-1755 -900,-1765 U4.2@-900,-1794.29
PTE29: C18.2 J10.9 R9.2 R10.1 | length 1442.4
  Top Layer w7: v2(-732,-1734) -738,-1728 -738,-1663 -700,-1625 v2(-540,-1625)
  Bottom Layer w7: J10.9@-800,-1900 -800,-1851.54 C18.2@-728.46,-1780 -728.46,-1721.54 -730,-1720 -738,-1720 -732,-1726 v2(-732,-1734) ; v2(-540,-1625) -540,-1676 -416,-1800 -253,-1800 -222.56,-1769.56 R10.1@-222.56,-1385 -322.56,-1385 R9.2@-325,-1382.56
PTE30: J10.11
PTE31: J2.13
RESET/PTA20: J9.6
SDA_PTD5: J9.2
VREFH: J2.16
pads on no net: J2.15 U1.1 U3.1 U4.1 U5.1 U7.1

## Polygon pours and split planes (outlines as drawn)
GND on Bottom Layer "Bottom Layer-No Net" (solid, remove dead copper, pour order 5): -3200,0 -3200,-2100 0,-2100 0,0 -3200,0
GND on Top Layer "Bottom Layer-No Net" (solid, remove dead copper, pour order 7): -3200,0 -3200,-2100 -100,-2100 0,-2100 0,0 -3200,0

## Keep-outs
Keep-Out Layer:
  the board outline again, w5

## Other copper
Top Layer:
  text "Top Copper" at -2050,100 h250
Bottom Layer:
  text "Bottom Copper" at -875,100 h250

## Silkscreen, mask and mechanical layers (free items; w line width, h text height)
Top Overlay:
  lines w10: -2820,-2010 -2340,-2010 -2340,-2000 -2820,-2000 ; -2810,-1925 -2330,-1925 ; -2810,-1915 -2330,-1915 ; -2700,-2030 -2700,-1900 ; -2580,-2025 -2580,-1900 ; -2575,-745 -2530,-745 -2530,-645 -2495,-645 -2495,-745 -2440,-745 -2440,-645 -2405,-645 -2405,-745 -2350,-745 ; -2460,-2025 -2460,-1900 ; -2150,-1950 -2150,-1855 -2050,-1855 -2050,-1950 -2150,-1950 ; -1600,-245 -1600,-150 -1500,-150 -1500,-245 -1600,-245 ; -1250,-1950 -1250,-1850 -1150,-1850 -1150,-1950 -1250,-1950 ; -750,-245 -650,-245 -650,-150 -750,-150 -750,-245
  lines w15: -2845.25,-209 -2745.25,-209 ; -2820.25,-234 -2770.25,-234 ; -2805.25,-259 -2785.25,-259 ; -2795.25,-209 -2795.25,-154
  lines w20: -2834,-1900 -2834,-2025 -2820,-2025 ; -2834,-1890 -2820,-1890 -2820,-1910 ; -2820,-1920 -2820,-2025 ; -2820,-1900 -2340,-1900 -2340,-2025 -2820,-2025 ; -2315,-2000 -2315,-1920 ; -2330,-2000 -2330,-1920 -2300,-1920 -2300,-2000 -2330,-2000
  text "J2" at -2475,-40 h50
  text "2" at -1565,-40 h50
  text "J1" at -1440,-40 h50
  text "2" at -710,-40 h50
  text "1" at -1555,-285 h50
  text "1" at -705,-290 h50
  text "V2013.03.22.emh - b" at -2490,-345 h100
  text "0" at -2944,-359 h200
  text "1" at -2645,-363 h200
  text "SPEED" at -2505,-405 h32
  text "SENSORS" at -2525,-435 h32
  text "A-1" at -40,-540 h100 r90
  text "S" at -2560,-615 h325
  text "A" at -1620,-745 h250
  text "A-2" at -30,-755 h100 r90
  text "LINESCAN" at -2315,-1020 h50
  text "CAMERAS" at -2310,-1065 h50
  text "GND" at -27,-1074 h100 r90
  text "c" at -2570,-1135 h500
  text "VBAT" at -27,-1344 h100 r90
  text "SERVOS" at -2560,-1465 h60
  text "B" at -1610,-1520 h250
  text "B-2" at -45,-1590 h100 r90
  text "s" at -2565,-1705 h350
  text "B-1" at -45,-1790 h100 r90
  text "FRDM-TFC" at -1730,-1820 h100
  text "F" at -2450,-1830 h250
  text "1" at -1280,-1915 h50
  text "1" at -2185,-1925 h50
  text "2" at -2185,-2015 h50
  text "2" at -1280,-2020 h50
  text "J9" at -2135,-2090 h50
  text "J10" at -1240,-2090 h50
Bottom Overlay:
  lines w10: 4221.5,-7060 4222,-7060
  lines w15: -2845,-210 -2745,-210 ; -2820,-235 -2770,-235 ; -2805,-260 -2785,-260 ; -2795,-210 -2795,-155
  text "3.3v" at -3050,-475 h75
  text "A-1" at -105,-515 h100
  text "SPEED" at -3035,-545 h55
  text "SENSE" at -3035,-590 h55
  text "GND" at -3040,-680 h75
  text "A-2" at -105,-705 h100
  text "AIN" at -3050,-875 h75
  text "SI" at -3055,-970 h75
  text "GND" at -65,-1030 h100
  text "CLK" at -3045,-1070 h75
  text "3.3v" at -3050,-1170 h75
  text "VBAT" at -30,-1230 h100
  text "GND" at -3045,-1275 h75
  text "GND" at -3040,-1475 h75
  text "B-1" at -95,-1555 h100
  text "+6v" at -3040,-1565 h75
  text "SERVO" at -3040,-1640 h50
  text "W" at -1925,-1670 h250
  text "PWM" at -3045,-1685 h62
  text "Wavenumber LLC" at -1930,-1715 h50
  text "DREAM>DESIGN>DELIVER" at -1930,-1750 h30
  text "B-2" at -95,-1760 h100
  text "ehughes@wavenumber.net" at -1935,-1785 h30
Outline:
  the board outline again, w10
Title Block Top:
  lines w0: 2515.09,-5508.16 122.09,-5508.16 122.09,-4918.34 2515.09,-4918.34
  lines w8: 820.05,-5508.16 820.05,-4918.34 ; 820.05,-5311.55 2515.09,-5311.55 ; 820.05,-5114.95 2515.09,-5114.95 ; 1368.44,-5311.55 1368.44,-5114.95 ; 2515.09,-5508.16 122.09,-5508.16 122.09,-4918.34 2515.09,-4918.34
  lines w10: -7384.74,-4608.65 -7284.74,-4608.65 ; -7384.74,-3608.65 -7284.74,-3608.65 -7284.74,-2608.65 -7384.74,-2608.65 ; -7384.74,-1608.65 -7284.74,-1608.65 ; -7384.74,-608.65 -7284.74,-608.65 ; -7384.74,391.35 -7284.74,391.35 ; -7384.74,1391.35 -7284.74,1391.35 ; -6384.74,-5608.65 -6384.74,-5508.65 ; -6384.74,1791.35 -6384.74,1891.35 ; -5384.74,-5608.65 -5384.74,-5508.65 ; -5384.74,1791.35 -5384.74,1891.35 ; -4384.74,-5608.65 -4384.74,-5508.65 ; -4384.74,1791.35 -4384.74,1891.35 ; -3384.74,-5608.65 -3384.74,-5508.65 ; -3384.74,1791.35 -3384.74,1891.35 ; -2384.74,-5608.65 -2384.74,-5508.65 ; -2384.74,1791.35 -2384.74,1891.35 ; -1384.74,-5608.65 -1384.74,-5508.65 ; -1384.74,1791.35 -1384.74,1891.35 ; -384.74,-5608.65 -384.74,-5508.65 ; -384.74,1791.35 -384.74,1891.35 ; 615.26,-5608.65 615.26,-5508.65 ; 615.26,1791.35 615.26,1891.35 ; 1615.26,-5608.65 1615.26,-5508.65 ; 1615.26,1791.35 1615.26,1891.35 ; 2515.09,-5508.16 2515.09,-4918.34 ; 2515.26,-4608.65 2615.26,-4608.65 ; 2515.26,-3608.65 2615.26,-3608.65 2615.26,-2608.65 2515.26,-2608.65 ; 2515.26,-1608.65 2615.26,-1608.65 ; 2515.26,-608.65 2615.26,-608.65 ; 2515.26,391.35 2615.26,391.35 ; 2515.26,1391.35 2615.26,1391.35 ; 2615.26,-5508.65 2615.26,-5608.65 ; 2615.26,-5608.65 -7384.74,-5608.65 -7384.74,1891.35 2615.26,1891.35 2615.26,-5608.65 ; -7284.74,-5508.65 2515.26,-5508.65 2515.26,1791.35 -7284.74,1791.35 -7284.74,-5508.65
  text "1" at -6919.74,1811.35 h100
  text "2" at -5844.74,1811.35 h100
  text "3" at -4894.74,1811.35 h100
  text "4" at -3844.74,1811.35 h100
  text "5" at -2894.74,1811.35 h100
  text "6" at -1869.74,1811.35 h100
  text "7" at -919.74,1811.35 h100
  text "8" at 55.26,1811.35 h100
  text "9" at 1155.26,1811.35 h100
  text "10" at 2105.26,1811.35 h100
  text "H" at -7369.74,1556.35 h100
  text "H" at 2535.26,1551.35 h100
  text "G" at -7369.74,831.35 h100
  text "G" at 2535.26,826.35 h100
  text "F" at -7359.74,-153.65 h100
  text "F" at 2545.26,-158.65 h100
  text "E" at -7369.74,-1118.65 h100
  text "E" at 2535.26,-1123.65 h100
  text "D" at -7369.74,-2118.65 h100
  text "D" at 2535.26,-2123.65 h100
  text "C" at -7359.74,-3088.65 h100
  text "C" at 2545.26,-3093.65 h100
  text "B" at -7364.74,-4133.65 h100
  text "B" at 2540.26,-4138.65 h100
  text ".Title" at 843.5,-5069 h175
  text "A" at -7359.74,-5133.65 h100
  text "A" at 2545.26,-5138.65 h100
  text "R" at 869.9,-5264.05 h95.35
  text "e" at 924.65,-5264.05 h95.35
  text "v" at 979.39,-5264.05 h95.35
  text ":" at 1034.14,-5264.05 h95.35
  text ".ENGINEER" at 1416.26,-5264.65 h175
  text ".REV" at 1097.26,-5271.65 h175
  text "W" at 163.5,-5288 h750
  text "Wavenumber" at 187.5,-5379 h100
  text ".Date" at 863.26,-5461.65 h175
  text "LLC" at 382.5,-5473 h100
  text "1" at -6909.74,-5583.65 h100
  text "2" at -5834.74,-5583.65 h100
  text "3" at -4884.74,-5583.65 h100
  text "4" at -3834.74,-5583.65 h100
  text "5" at -2884.74,-5583.65 h100
  text "6" at -1859.74,-5583.65 h100
  text "7" at -909.74,-5583.65 h100
  text "8" at 65.26,-5583.65 h100
  text "9" at 1165.26,-5583.65 h100
  text "10" at 2115.26,-5583.65 h100
Title Block Bottom:
  lines w0: -7281.33,-5508.16 -4888.33,-5508.16 -4888.33,-4918.34 -7281.33,-4918.34
  lines w8: -7281.33,-5508.16 -4888.33,-5508.16 -4888.33,-4918.34 -7281.33,-4918.34 ; -7281.33,-5311.55 -5586.28,-5311.55 ; -7281.33,-5114.95 -5586.28,-5114.95 ; -6134.68,-5311.55 -6134.68,-5114.95 ; -5586.28,-5508.16 -5586.28,-4918.34
  lines w10: -7381.5,-5508.65 -7381.5,-5608.65 ; -7381.5,-4608.65 -7281.5,-4608.65 ; -7381.5,-1608.65 -7281.5,-1608.65 ; -7381.5,-608.65 -7281.5,-608.65 ; -7381.5,391.35 -7281.5,391.35 ; -7381.5,1391.35 -7281.5,1391.35 ; -7281.5,-3608.65 -7381.5,-3608.65 -7381.5,-2608.65 -7281.5,-2608.65 ; -7281.33,-5508.16 -7281.33,-4918.34 ; -6381.5,-5608.65 -6381.5,-5508.65 ; -6381.5,1791.35 -6381.5,1891.35 ; -5381.5,-5608.65 -5381.5,-5508.65 ; -5381.5,1791.35 -5381.5,1891.35 ; -4381.5,-5608.65 -4381.5,-5508.65 ; -4381.5,1791.35 -4381.5,1891.35 ; -3381.5,-5608.65 -3381.5,-5508.65 ; -3381.5,1791.35 -3381.5,1891.35 ; -2381.5,-5608.65 -2381.5,-5508.65 ; -2381.5,1791.35 -2381.5,1891.35 ; -1381.5,-5608.65 -1381.5,-5508.65 ; -1381.5,1791.35 -1381.5,1891.35 ; -381.5,-5608.65 -381.5,-5508.65 ; -381.5,1791.35 -381.5,1891.35 ; 618.5,-5608.65 618.5,-5508.65 ; 618.5,1791.35 618.5,1891.35 ; 1618.5,-5608.65 1618.5,-5508.65 ; 1618.5,1791.35 1618.5,1891.35 ; 2518.5,-4608.65 2618.5,-4608.65 ; 2518.5,-1608.65 2618.5,-1608.65 ; 2518.5,-608.65 2618.5,-608.65 ; 2518.5,391.35 2618.5,391.35 ; 2518.5,1391.35 2618.5,1391.35 ; 2618.5,-3608.65 2518.5,-3608.65 2518.5,-2608.65 2618.5,-2608.65 ; -7381.5,-5608.65 -7381.5,1891.35 2618.5,1891.35 2618.5,-5608.65 -7381.5,-5608.65 ; -7281.5,-5508.65 -7281.5,1791.35 2518.5,1791.35 2518.5,-5508.65 -7281.5,-5508.65
  text "10" at -6871.5,1811.35 h100
  text "9" at -5921.5,1811.35 h100
  text "8" at -4821.5,1811.35 h100
  text "7" at -3846.5,1811.35 h100
  text "6" at -2896.5,1811.35 h100
  text "5" at -1871.5,1811.35 h100
  text "4" at -921.5,1811.35 h100
  text "3" at 128.5,1811.35 h100
  text "2" at 1078.5,1811.35 h100
  text "1" at 2153.5,1811.35 h100
  text "H" at 2603.5,1556.35 h100
  text "H" at -7301.5,1551.35 h100
  text "G" at 2603.5,831.35 h100
  text "G" at -7301.5,826.35 h100
  text "F" at 2593.5,-153.65 h100
  text "F" at -7311.5,-158.65 h100
  text "E" at 2603.5,-1118.65 h100
  text "E" at -7301.5,-1123.65 h100
  text "D" at 2603.5,-2118.65 h100
  text "D" at -7301.5,-2123.65 h100
  text "C" at 2593.5,-3088.65 h100
  text "C" at -7311.5,-3093.65 h100
  text "B" at 2598.5,-4133.65 h100
  text "B" at -7306.5,-4138.65 h100
  text ".Title" at -5609.74,-5069 h175
  text "A" at 2593.5,-5133.65 h100
  text "A" at -7311.5,-5138.65 h100
  text ":" at -5800.37,-5264.05 h95.35
  text "v" at -5745.63,-5264.05 h95.35
  text "e" at -5690.88,-5264.05 h95.35
  text "R" at -5636.14,-5264.05 h95.35
  text ".ENGINEER" at -6182.5,-5264.65 h175
  text ".REV" at -5863.5,-5271.65 h175
  text "W" at -4929.74,-5288 h750
  text "Wavenumber" at -4953.74,-5379 h100
  text ".Date" at -5629.5,-5461.65 h175
  text "LLC" at -5148.74,-5473 h100
  text "10" at -6881.5,-5583.65 h100
  text "9" at -5931.5,-5583.65 h100
  text "8" at -4831.5,-5583.65 h100
  text "7" at -3856.5,-5583.65 h100
  text "6" at -2906.5,-5583.65 h100
  text "5" at -1881.5,-5583.65 h100
  text "4" at -931.5,-5583.65 h100
  text "3" at 118.5,-5583.65 h100
  text "2" at 1068.5,-5583.65 h100
  text "1" at 2143.5,-5583.65 h100
PCB Notes:
  lines w10: -4650,-4050 -4650,-3450
  lines w30: -6875,-3375 -4550,-3375
  text "PCB Fabrication Notes" at -7092,1419 h500
  text "Technical Point of Contact: Eli Hughes ehughes@wavenumber.net" at -7114,1179 h100
  text "Route to Overall Shape on Board Outline Layer" at -7106,1080 h100
  text "2-LAYER PCB .063\" Thickness" at -7100,975 h100
  text "Black Solder Mask - Both Sides" at -7100,875 h100
  text "White Legend (LPI Process)" at -7100,775 h100
  text "1oz Copper - Top/Bottom Layers" at -7102,686 h100
  text "Min Hole:12mil" at -7110,592 h100
  text "Min Trace/Space: 6mil" at -7108,494 h100
  text "Holes:" at -7108,394 h100
  text ".Hole_Count" at -6783,394 h100
  text "Gerbers in RS-274x  2.5 Format" at -7108,294 h100
  text "NC Drill in 2.5 Format Trailing Zeros Suppressed" at -7108,194 h100
  text "Polarity" at -5100,-3300 h125
  text "Gerber Files / Stackup" at -6875,-3325 h125
  text "Positive" at -5100,-3525 h100
  text ".GTL" at -6825,-3550 h100
  text "Top Copper" at -6175,-3550 h100
  text ".GBL" at -6825,-4050 h100
  text "Bottom Copper" at -6150,-4050 h100
  text "Positive" at -5100,-4050 h100
  text ".GTO" at -6825,-4325 h100
  text "TOP SILKSCREEN" at -6175,-4325 h100
  text "Positive" at -5075,-4325 h100
  text ".GTS" at -6825,-4425 h100
  text "TOP SOLDERMASK" at -6175,-4425 h100
  text "Positive" at -5075,-4425 h100
  text ".GTP" at -6825,-4525 h100
  text "Top Paste" at -6175,-4525 h100
  text "Positive" at -5075,-4525 h100
  text ".GBO" at -6825,-4625 h100
  text "BOTTOM SILKSCREEN" at -6175,-4625 h100
  text "Positive" at -5075,-4625 h100
  text ".GBS" at -6825,-4725 h100
  text "BOTTOM SOLDERMASK" at -6175,-4725 h100
  text "Positive" at -5075,-4725 h100
  text ".GBP" at -6825,-4825 h100
  text "Bottom Paste" at -6175,-4825 h100
  text "Positive" at -5075,-4825 h100
  text ".TXT" at -6825,-4925 h100
  text "NC Drill" at -6175,-4925 h100
  text "Positive" at -5075,-4925 h100
  text "Positive" at -5075,-5000 h100
  text ".GM5" at -6850,-5025 h100
  text "BOARD OUTLINE" at -6175,-5025 h100

## Dimensions
-2700,-1600 to -3400,-2050 on Dimension
-500,0 to -500,-2100 on Dimension
-3200,-500 to 0,-500 on Dimension

## Text inside footprints (layer, text, board x,y; h text height)
SW3: Top Overlay "1" at -1615.5,-1190 h40 r90; Top Overlay "2" at -1615.5,-1100 h40 r90; Top Overlay "3" at -1615.5,-995 h40 r90; Top Overlay "4" at -1615.5,-905 h40 r90